# Altium PCB PCB1.PcbDoc (part 2 of 2)
Units mm, origin at the board's own origin, x right, y up, seen from the top; angles counter-clockwise.
Board outline 99.19 x 99.06 mm, 2 copper layers (Top Layer, Bottom Layer); 87 components, 74 nets, 377 pads, 55 vias.
Unrouted connection lines stored in the file: 5.
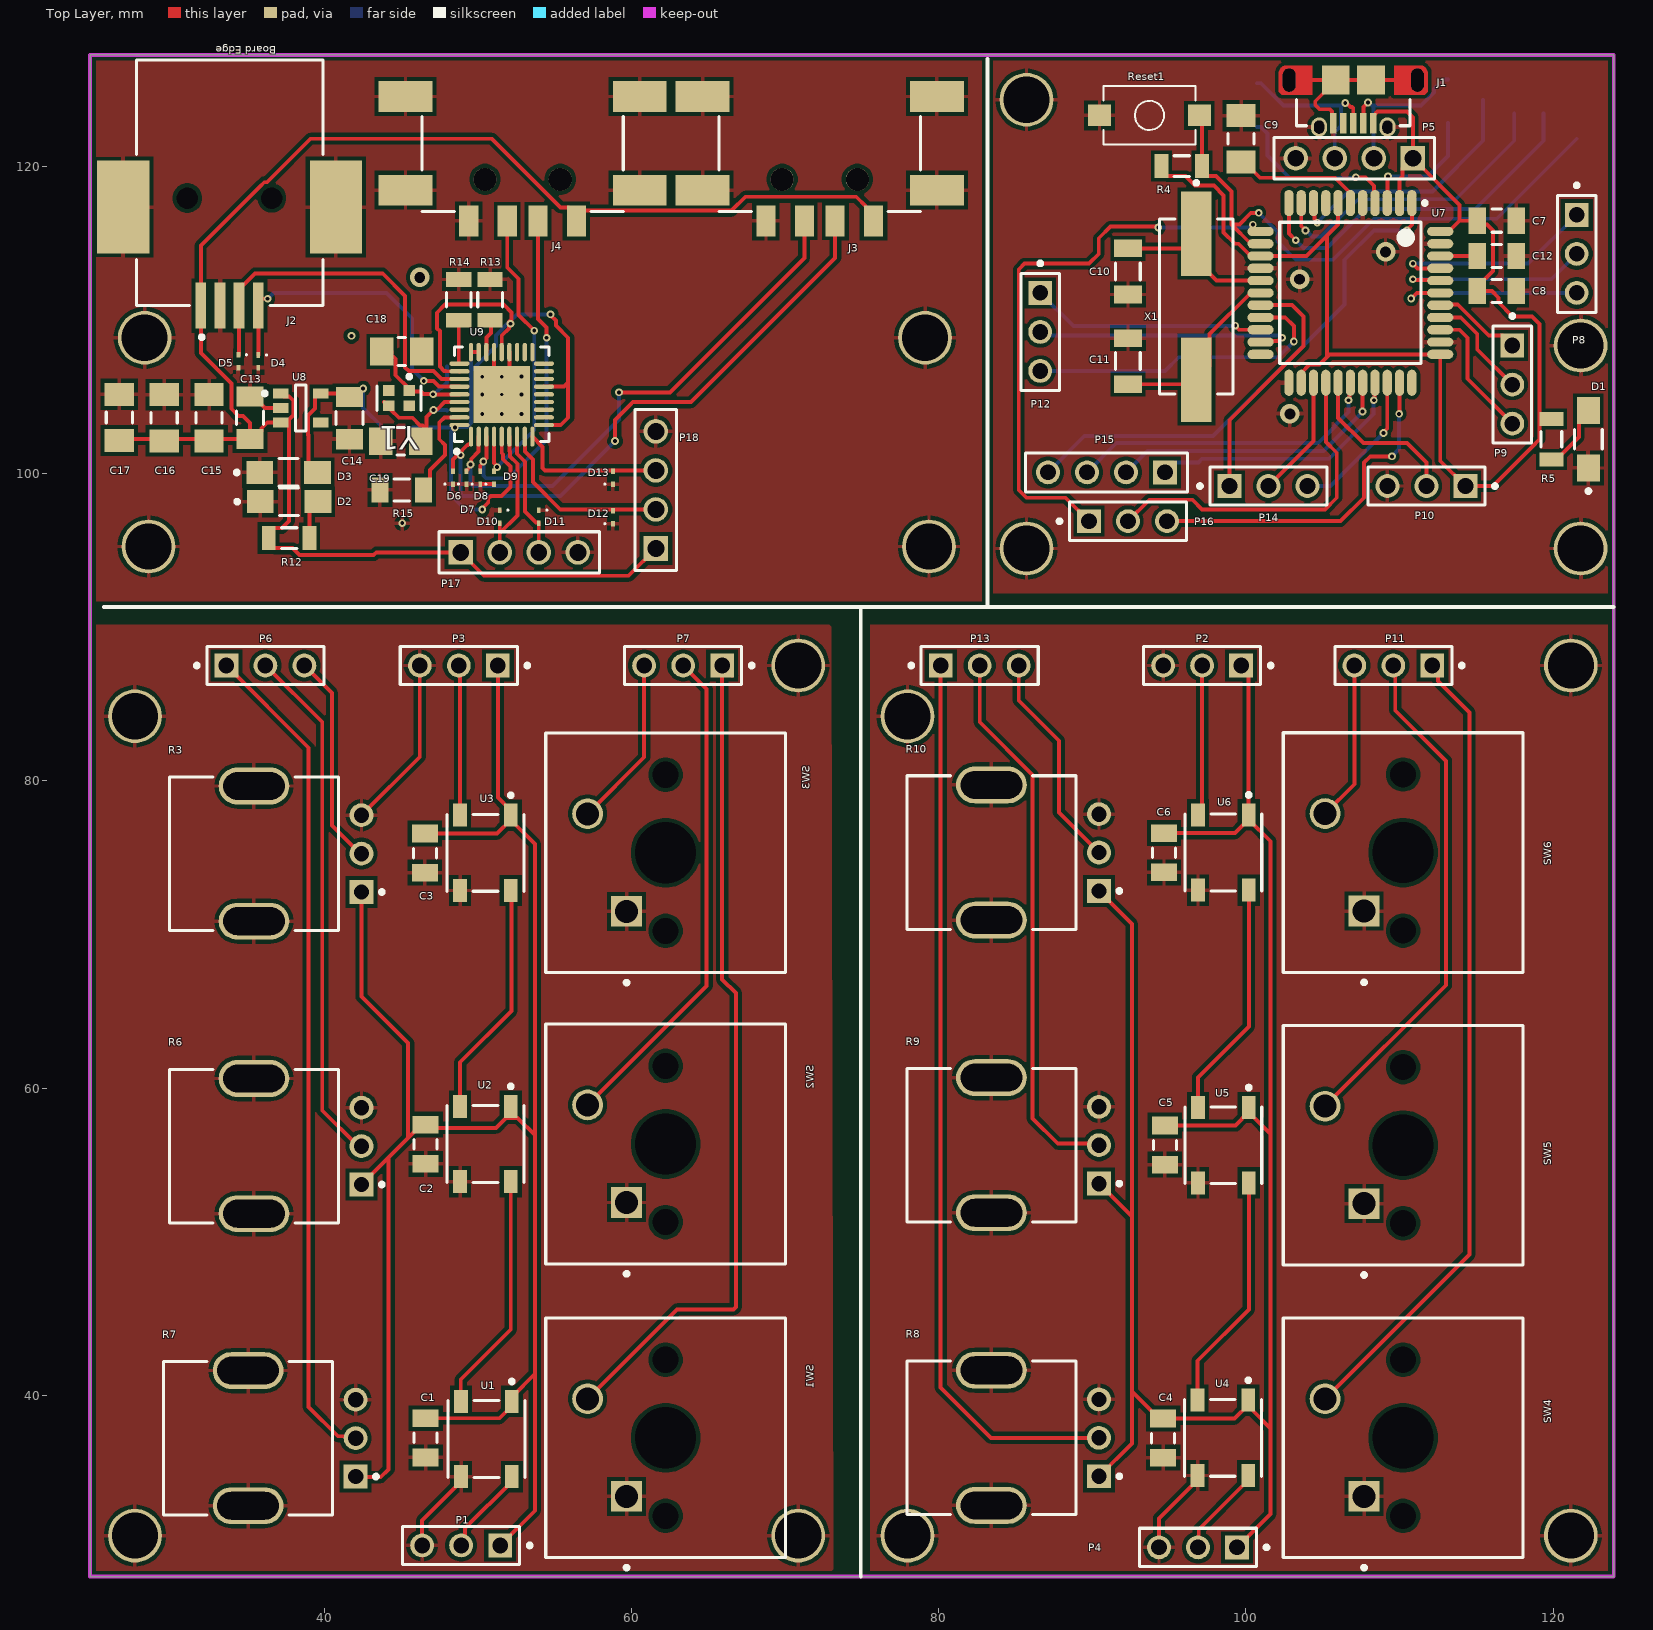
[diagram p0: Top Layer view]

## Via types
v1: diameter 0.5, hole 0.254, Top Layer to Bottom Layer, 50 vias
v2: diameter 1.27, hole 0.711, Top Layer to Bottom Layer, 4 vias
v3: diameter 0.5, hole 0.2, Top Layer to Bottom Layer, 1 vias

## Nets (pads, with @x,y where several pads share a name; then routed paths per layer and width w, separated by ;. In a path a pad name is that pad's centre, name@x,y a point inside that pad or via, vN(x,y) a via of type N, cw(c..) or ccw(c..) an arc to the next point about the centre after c; other vN are vias at no path point) (continued)
NetP13_2: P13.2 R9.2 | length 35.9
  Top Layer w0.254: P13.2 82.677,83.828 86.12,80.385 86.12,58.025 87.757,56.388 90.331,56.388 R9.2
NetP13_3: P13.3 R10.2 | length 14.3
  Top Layer w0.254: P13.3 85.217,85.217 87.828,82.606 87.828,77.941 R10.2
NetR13_2: R13.2 U9.25 | length 2.2
  Top Layer w0.254: U9.25 50.567,107.911 50.567,108.86 50.867,109.16 50.867,109.682 R13.2@51.054,109.87
NetR14_2: R14.2 U9.28 | length 2.8
  Top Layer w0.254: R14.2@48.768,109.87 48.768,107.168 48.78,107.156 U9.28
NetR15_1: R15.1 U9.35 | length 6.6
  Top Layer w0.254: R15.1 46.891,99.342 46.891,100.224 47.879,101.212 47.879,101.854 47.498,102.235 47.498,103.312 47.837,103.651 48.817,103.651 U9.35
NetU1_2: U1.2 U2.4 | length 15.7
  Top Layer w0.254: U1.2 48.895,39.626 48.895,41.021 52.152,44.278 U2.4
NetU2_2: U2.2 U3.4 | length 15.5
  Top Layer w0.254: U2.2 48.852,61.679 52.197,65.024 52.197,72.816 U3.4
NetU4_2: U4.2 U5.4 | length 15.5
  Top Layer w0.254: U4.2 96.858,42.248 100.203,45.593 100.203,53.814 U5.4
NetU5_2: U5.2 U6.4 | length 15.5
  Top Layer w0.254: U5.2 96.887,60.692 100.203,64.008 100.203,72.864 U6.4
RESET: pad.3@121.539,124.333 R4.2 Reset1.2 U7.13 | length 38.4
  Top Layer w0.254: Reset1.2 97.155,123.138 R4.2 97.155,119.69 97.478,119.367 98.057,119.367 99.06,118.364 99.06,116.22 ; v1(100.838,116.967) 100.322,116.967 99.576,116.22 99.06,116.22 ; U7.13 100.32,114.96 99.06,116.22
  Bottom Layer w0.254: v1(100.838,116.967) 102.063,115.742 102.063,115.107 103.251,113.919 105.664,113.919 108.331,116.586 116.332,116.586 121.539,121.793
SCK: pad.3@115.443,124.333 U7.9 | length 17
  Top Layer w0.254: U7.9 104.473,117.544 104.473,116.573 104.648,116.399 v1(104.648,116.332)
  Bottom Layer w0.254: v1(104.648,116.332) 106.68,118.364 112.141,118.364 115.443,121.666 pad.3@115.443,124.333
UCAP: C9.1 U7.6 | length 8.6
  Top Layer w0.254: C9.1 99.895,120.293 100.935,119.253 105.801,119.253 106.807,118.247 U7.6
VCC: C1.2 C2.2 C3.2 C7.2 C8.2 J1.1 P1.1 P3.1 P5.1 P10.1 R3.1 R4.1 R5.1 R6.1 R7.1 U1.1 U2.1 U3.1 U7.2 U7.7 U7.14 U7.24 U7.34 U7.44 | length 213.9
  Top Layer w0.254: R7.1 42.092,34.671 43.688,34.671 44.196,35.179 44.196,55.484 ; R6.1 44.196,55.484 ; R3.1 42.433,65.958 45.466,62.925 45.466,56.754 ; C3.2 51.258,76.566 U3.1@52.152,77.461 ; C1.2 51.425,38.505 52.22,39.301 U1.1 52.22,39.901 53.721,41.401 ; P3.1 51.308,78.905 52.152,78.061 U3.1 U3.1@52.152,77.461 ; P1.1 53.721,32.487 53.721,41.401 ; R4.1 94.505,119.69 94.828,119.367 96.062,119.367 96.684,118.745 97.917,118.745 98.552,118.11 98.552,115.697 99.287,114.962 99.519,114.962 100.32,114.16 U7.14 103.95,114.16 105.283,115.493 ; U7.24 103.607,106.547 104.147,107.087 104.784,107.087 105.283,107.586 ; U7.7 106.007,116.217 105.283,115.493 ; J1.1 108.295,123.28 108.576,123.561 110.5,123.561 110.871,123.19 P5.1 ; U7.2@109.982,117.831 110.007,117.856 110.007,119.151 110.198,119.342 110.198,119.85 P5.1 ; U7.44 113.207,115.76 113.906,116.459 ; 44.196,55.484 45.466,56.754 ; 45.466,56.754 46.116,57.404 51.181,57.404 51.838,58.061 52.6,58.061 53.721,56.939 ; U3.1@52.152,77.461 53.721,75.892 53.721,56.939 ; 53.721,41.401 53.721,56.939 ; 105.283,107.586 105.457,107.76 U7.34 112.657,100.83 P10.1 116.078,99.187 118.619,101.728 119.126,102.235 119.126,109.728 118.618,110.236 117.371,110.236 116.455,111.152 116.455,111.445 116.013,111.887 C8.2 115.057,112.162 116.078,113.183 116.078,115.824 115.697,116.205 115.311,116.205 C7.2 113.906,116.459 ; 105.283,107.586 105.283,115.493 ; P5.1 111.188,120.206 113.906,117.488 113.906,116.459
XTAL1: C11.2 U7.17 X1.2 | length 12.3
  Top Layer w0.254: C11.2 96.468,105.815 X1.2 97.647,106.994 97.647,109.087 100.32,111.76 U7.17
XTAL2: C10.2 U7.16 X1.1 | length 11.3
  Top Layer w0.254: C10.2 95.901,114.657 X1.1@96.774,115.53 ; X1.1 X1.1@96.774,115.53 ; U7.16 98.085,112.56 96.774,113.871 X1.1@96.774,115.53
XTALIN: C19.1 R11.2 U9.33 Y1.3 | length 8.4
  Top Layer w0.254: Y1.3@43.902,104.656 43.927,104.656 44.15,104.433 Y1.3@44.15,104.408 ; Y1.3@44.364,104.146 44.878,103.632 45.751,103.632 46.245,103.138 46.396,103.138 C19.1@46.631,102.903 ; C19.1 46.47,102.288 46.47,103.064 ; C19.1@46.662,102.903 46.662,103.685 47.164,104.187 47.373,104.187 47.837,104.651 48.807,104.651 U9.33
  Bottom Layer w0.254: v1(47.117,104.14) 47.978,104.14 R11.2
XTALOUT: C18.1 R11.1 U9.32 Y1.1 | length 8.6
  Top Layer w0.254: C18.1@44.388,107.95 44.388,107.727 44.656,107.459 44.656,106.402 45.521,105.537 45.546,105.537 45.747,105.336 46.302,105.336 46.467,105.171 47.087,105.171 v1(47.098,105.16) ; v1@47.098,105.166 47.105,105.158 48.81,105.158 U9.32
  Bottom Layer w0.254: v1(47.098,105.16) 47.164,105.16 47.571,105.566 47.654,105.566 48.006,105.918 R11.1
pads on no net: J1.4 J2.MH J3.MH1 J3.MH2 J4.MH1 J4.MH2 SW1.MH1 SW1.MH2 SW1.MH3 SW2.MH1 SW2.MH2 SW2.MH3 SW3.MH1 SW3.MH2 SW3.MH3 SW4.MH1 SW4.MH2 SW4.MH3 SW5.MH1 SW5.MH2 SW5.MH3 SW6.MH1 SW6.MH2 SW6.MH3 U7.8 U7.22 U7.33 U8.4 U9.11 U9.12 U9.13 U9.14 U9.16 U9.17 U9.18 U9.19 U9.20 U9.21 U9.34 Y1.2
copper on no net:
  other v1: 41.783,108.966
  other v2: 46.228,112.776

## Polygon pours and split planes (outlines as drawn)
GND on Bottom Layer "GND_L02_P014" (solid, pour order 14): 24.765,127.254 82.804,127.254 82.804,91.694 24.765,91.694
GND on Bottom Layer "GND_L02_P015" (solid, pour order 15): 123.952,127.254 123.952,92.202 83.566,92.202 83.566,127.254
GND on Bottom Layer "GND_L02_P005" (solid, pour order 5): 73.025,90.043 72.898,90.17 24.765,90.17 24.765,28.194 73.152,28.194
GND on Bottom Layer "GND_L02_P003" (solid, pour order 3): 123.825,90.024 123.698,90.151 75.565,90.151 75.565,28.175 123.952,28.175
GND on Top Layer "GND_L01_P016" (solid, pour order 16): 24.765,127.254 24.765,91.694 82.804,91.694 82.804,127.254
GND on Top Layer "GND_L01_P011" (solid, pour order 11): 123.952,127.254 123.952,92.202 83.566,92.202 83.566,127.254
GND on Top Layer "GND_L01_P004" (solid, pour order 4): 73.025,90.043 72.898,90.17 24.765,90.17 24.765,28.194 73.152,28.194
GND on Top Layer "GND_L01_P002" (solid, pour order 2): 123.762,89.979 123.571,90.17 75.565,90.17 75.565,28.194 123.889,28.194

## Keep-outs
Keep-Out Layer:
  the board outline again, w0.254

## Silkscreen, mask and mechanical layers (free items; w line width, h text height)
Top Overlay:
  lines w0.254: 25.654,91.313 123.952,91.313 ; 74.93,28.194 74.93,91.313 ; 83.185,91.313 83.185,127
Bottom Overlay:
  lines w0.254: 25.527,91.313 123.825,91.313 ; 74.803,28.194 74.803,91.313 ; 83.058,91.313 83.058,127
  text "opiti  wopiti  you  are  now a brocoli" at 80.391,122.156 h3
  text "SCK" at 115.47,121.185 h0.5 r90
  text "MOSI" at 117.629,121.185 h0.5 r90
  text "MISO" at 119.661,121.185 h0.5 r90
  text "RESET" at 121.82,121.185 h0.5 r90
  text "X" at 87.503,113.411 h10
  text "D7" at 86.968,101.827 h0.5 r270
  text "D8" at 89.508,101.827 h0.5 r270
  text "D9" at 92.175,101.827 h0.5 r270
  text "D10" at 94.461,101.827 h0.5 r270
  text "X" at 67.564,100.965 h10
  text "D11" at 89.943,95.404 h0.5 r90
  text "D12" at 92.737,95.404 h0.5 r90
  text "D13" at 95.404,95.404 h0.5 r90
  text "opiti  wopiti  you  are  now a brocoli" at 117.221,92.955 h1.5

## Text inside footprints (layer, text, board x,y; h text height)
J1: Top 3D Body "PCB Edge" at 108.095,127.61 h0.41 r180
J2: Top Overlay "Board Edge" at 36.895,127.819 h0.5 r180
J3: Top 3D Body "PCB Edge" at 74.263,125.647 h0.61 r180
J4: Top 3D Body "PCB Edge" at 54.922,125.647 h0.61 r180